# Altium PCB LNA_v5.PcbDoc
Units mil, origin at the board's own origin, x right, y up, seen from the top; angles counter-clockwise.
Board outline 6000 x 4000 mil, 2 copper layers (Top Layer, Bottom Layer); 8 components, 0 nets, 7 pads, 0 vias.
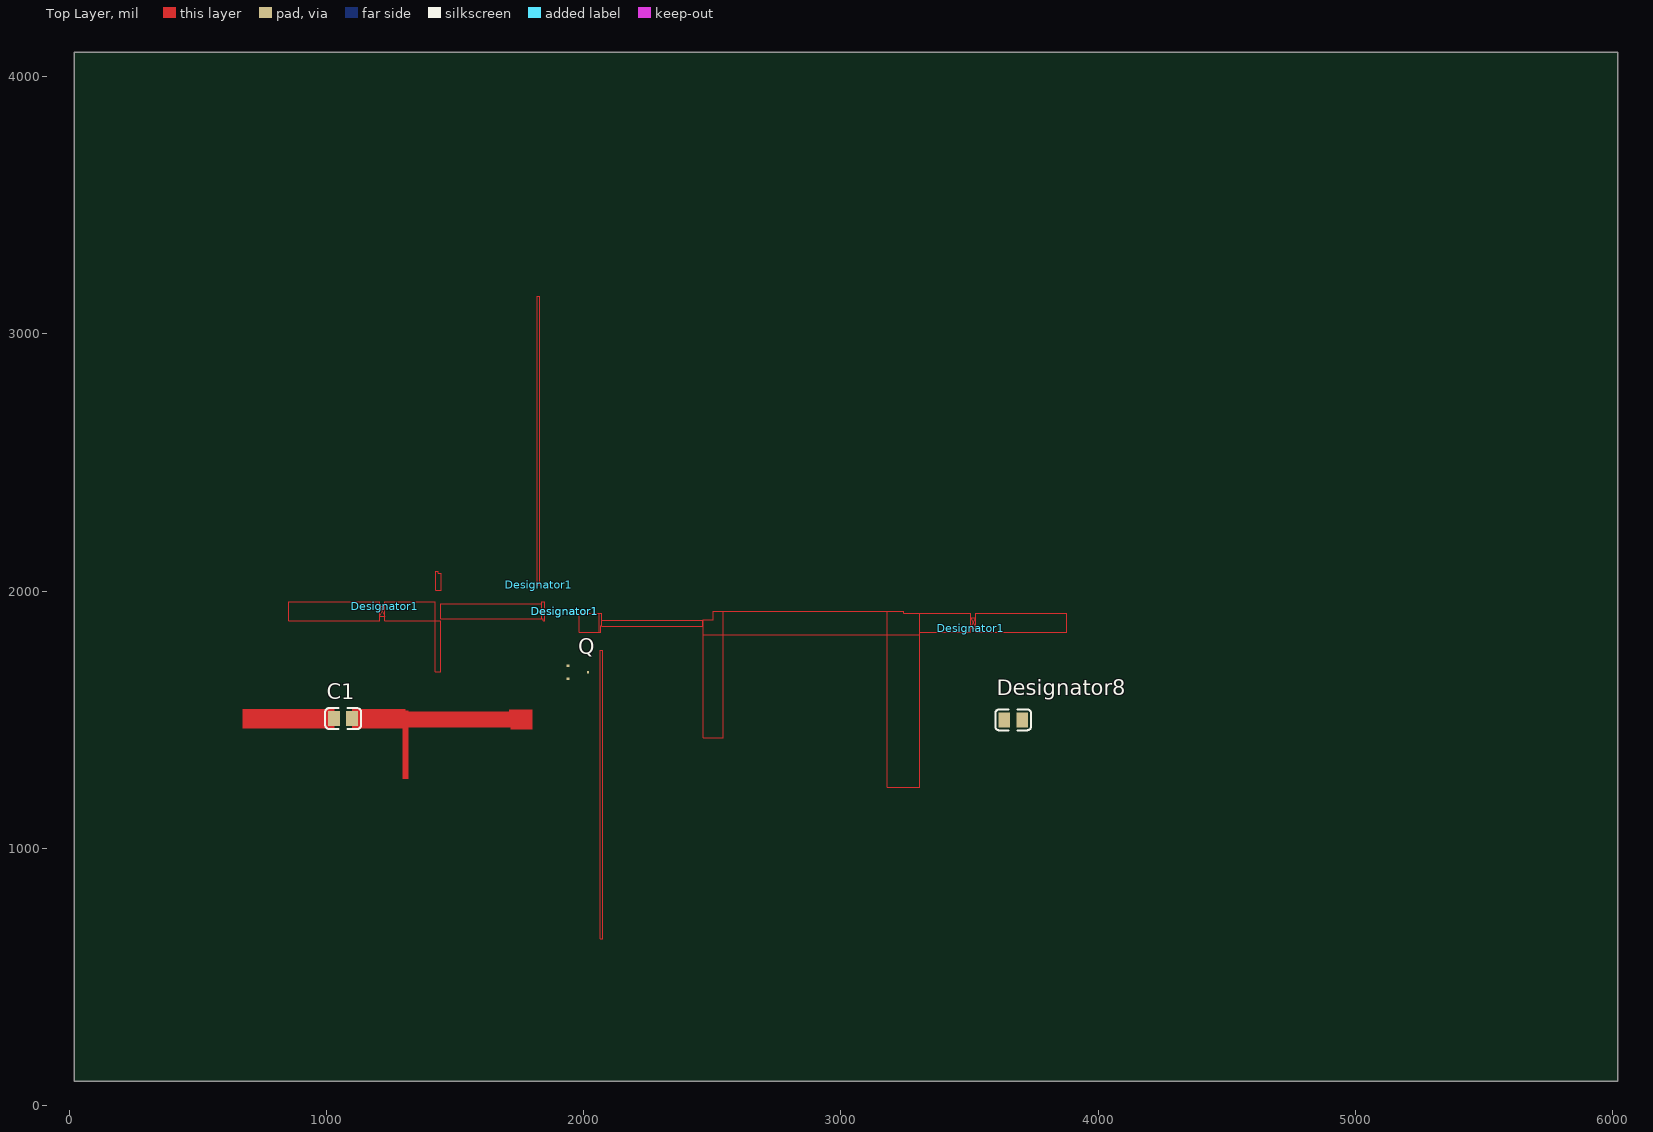
[diagram p0: Top Layer view]
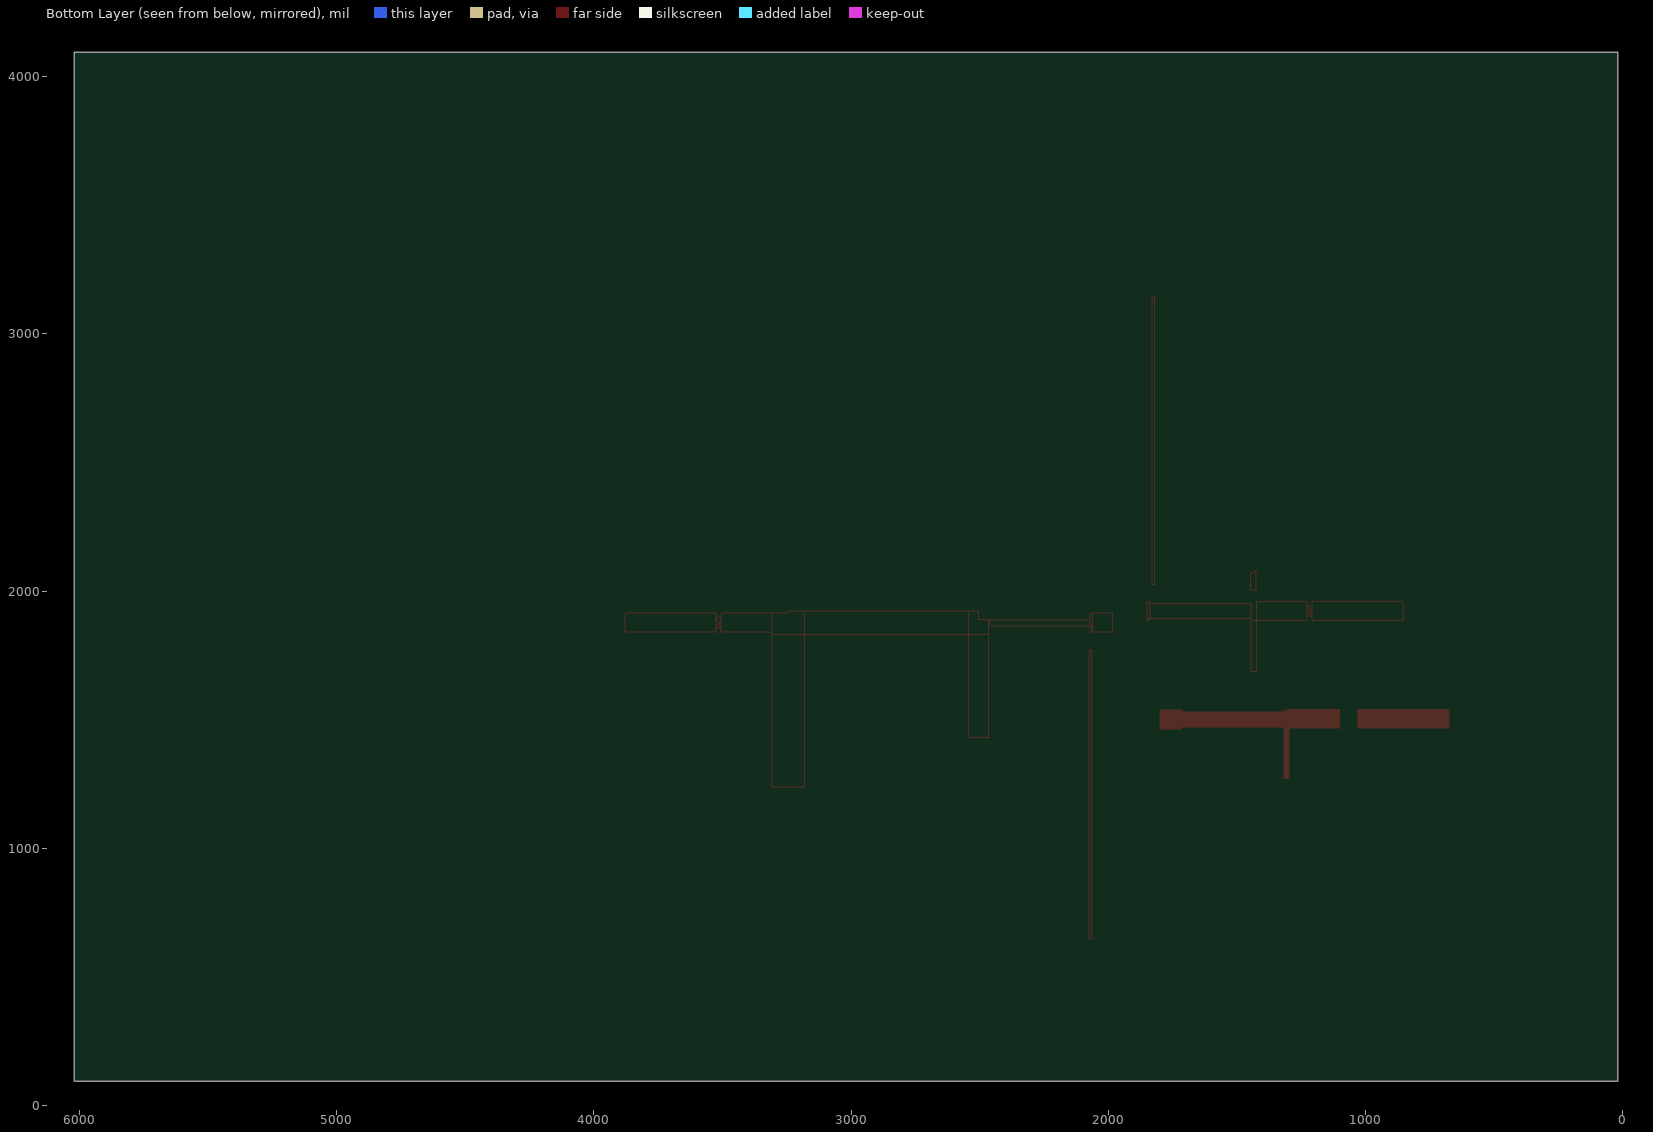
[diagram p1: Bottom Layer view, seen from below]

## Layer stack, top to bottom
Top Solder: solder mask 0.4, Solder Resist, Dk 3.5
Top Layer: signal copper 1.4
Dielectric 1: dielectric 12.6, FR-4, Dk 4.8
Bottom Layer: signal copper 1.4
Bottom Solder: solder mask 0.4, Solder Resist, Dk 3.5

## Board outline
20,95 6020,95 6020,4095 20,4095

## Design rules (kind name [scope] priority, off if disabled: settings)
Clearance [All] p1: gap=10 ignorepadtopadclearanceinfootprint=FALSE except(0: Arc-Hole Track-Hole SMDPad-Hole THPad-Hole Via-Hole Fill-Hole Poly-Hole Region-Hole Text-Hole)
PolygonConnect [All] p1: connectstyle=Relief reliefconductorwidth=10 reliefentries=4 polygonreliefangle="90 Angle" airgapwidth=10
RoutingVias [All] p1: holewidth=28 width=50 viastyle="Through Hole" minholewidth=28 minwidth=50 maxholewidth=28 maxwidth=50
SolderMaskExpansion [All] p1: expansion=4
Width [All] p1: maxlimit=10 minlimit=10 preferedwidth=10
30 further rules are at their usual default settings.

## Components (designator, comment, footprint, x,y, rotation, side; value= is the part's Value field where it differs from the comment)
C1 "Comment" 0805_C 1065,1505 r0 top
Designator1 "Comment" LNA_v4_feedback_test_ads_rflib__C__layout_C1_ 1227.29,1942.15 r180 top
Designator1 "Comment" LNA_v4_feedback_test_ads_tlines__MLIN__layout_TL4_ 1926.84,1921.65 r180 top
Designator1 "Comment" LNA_v4_feedback_test_ads_rflib__C__layout_C2_ 3504.47,1856.9 r0 top
Designator1 "Comment" LNA_v4_feedback_test_ads_tlines__MLIN__layout_TL14_ 1825,2025 r90 top
Designator1 "Comment" RF_Transistors__pb_hp_AT32032_19980529__layout 1927.09,1921.9 r270 top
Designator8 "Comment" 0805_C 3670,1500 r0 top
Q "Comment" PCBComponent_1 1940,1685 r0 top

## Footprints (in the part's own frame and the unit in brackets; to place one, negate y for a bottom-side part, rotate by r counter-clockwise, add the part's x,y. Pads: shape width x height; smd on the part's side, far side on the other; paste and mask are expansions set on the pad)
0805_C [mm]
  rect 1.16x1.47 smd: 1(-0.89,0) 2(0.89,0)
  silkscreen extent -1.77,-1.04 1.77,1.04, body extent -1,-0.62 1,0.63, height 0.77
LNA_v4_feedback_test_ads_rflib__C__layout_C1_ [mil]
  Top Layer lines w0.5: 20,40 0,0 ; 20,40 0,40 ; 20,40 20,0 ; 20,0 0,40 ; 20,0 0,0 ; 0,40 0,0
LNA_v4_feedback_test_ads_rflib__C__layout_C2_ [mil]
  Top Layer lines w0.5: 0,0 20,40 ; 0,0 0,40 ; 0,0 20,0 ; 0,40 20,0 ; 0,40 20,40 ; 20,0 20,40
LNA_v4_feedback_test_ads_tlines__MLIN__layout_TL4_ [mil]
LNA_v4_feedback_test_ads_tlines__MLIN__layout_TL14_ [mil]
  Top Layer lines w0.5: 0,5 1122.05,5 1122.05,-5 0,-5 0,5
PCBComponent_1 [mm]
  rect 0.3x0.25 smd: B(0,0.65) E(0,-0.65)
  rect 0.2x0.25 smd: C(1.95,0)
RF_Transistors__pb_hp_AT32032_19980529__layout [mil]

## Nets (pads, with @x,y where several pads share a name; then routed paths per layer and width w, separated by ;. In a path a pad name is that pad's centre, name@x,y a point inside that pad or via, vN(x,y) a via of type N, cw(c..) or ccw(c..) an arc to the next point about the centre after c; other vN are vias at no path point)
pads on no net: C1.1 C1.2 Designator8.1 Designator8.2 Q.B Q.C Q.E
copper on no net: | length 12776.5
  Top Layer w0.5: 1424.14,1885.09 1444.72,1885.09 1444.72,1687.11 1424.14,1687.11 1424.14,1885.09 ; 1424.14,1885.09 1424.14,1959.21 1227.29,1959.21 1227.29,1885.09 1424.14,1885.09 ; 1838.09,1892.62 1838.09,1959.21 1848.09,1959.21 ; 1838.09,1892.62 1843.09,1892.62 1843.09,1885.09 1848.09,1885.09 ; 1838.09,1892.62 1444.72,1892.62 1444.72,1951.68 1838.09,1951.68 1838.09,1892.62 ; 1848.09,1885.09 1848.09,1959.21 ; 1848.09,1885.09 1848.09,1959.21 ; 2061.08,1839.84 2061.08,1913.96 ; 2061.08,1839.84 2066.08,1839.84 2066.08,1865.33 2071.08,1865.33 2071.08,1913.96 2061.08,1913.96 ; 2061.08,1839.84 2061.08,1913.96 ; 2061.08,1839.84 1982.34,1839.84 1982.34,1913.96 2061.08,1913.96 ; 2464.78,1831.23 2464.78,1888.47 2504.11,1888.47 2504.11,1922.57 2543.44,1922.57 ; 2464.78,1831.23 2543.44,1831.23 ; 2464.78,1831.23 2464.78,1430.51 2543.44,1430.51 2543.44,1831.23 ; 2464.78,1831.23 2543.44,1831.23 ; 2543.44,1831.23 2543.44,1922.57 ; 2543.44,1831.23 3179.66,1831.23 ; 2543.44,1831.23 2543.44,1922.57 ; 2543.44,1922.57 3179.66,1922.57 ; 3179.66,1831.23 3179.66,1238.71 3307.62,1238.71 3307.62,1831.23 ; 3179.66,1831.23 3307.62,1831.23 ; 3179.66,1831.23 3307.62,1831.23 ; 3179.66,1831.23 3179.66,1922.57 ; 3179.66,1831.23 3179.66,1922.57 ; 3179.66,1922.57 3243.64,1922.57 3243.64,1913.96 3307.62,1913.96 ; 3307.62,1831.23 3307.62,1913.96 ; 3307.62,1913.96 3504.47,1913.96 3504.47,1839.84 3307.62,1839.84 3307.62,1913.96 ; 852.96,1885.09 1207.29,1885.09 1207.29,1959.21 852.96,1959.21 852.96,1885.09 ; 1425,2002.94 1425,2077.06 1435.29,2077.06 1435.29,2069.53 1445.58,2069.53 1445.58,2002.94 1425,2002.94 ; 2065,647.95 2075,647.95 2075,1770 2065,1770 2065,647.95 ; 2070,1863.43 2070,1886.57 2463.7,1886.57 2463.7,1863.43 2070,1863.43 ; 3524.47,1839.84 3878.8,1839.84 3878.8,1913.96 3524.47,1913.96 3524.47,1839.84

## Other copper
Top Layer:
  region: 1710.77,1471.89 ccw(c1711.03,1471.89) 1711.03,1471.63 1715.77,1471.63 1715.77,1464.37 ccw(c1716.03,1464.37) 1716.03,1464.1 1721.03,1464.1 ccw(c1721.03,1464.37) 1721.3,1464.37 1721.3,1538.48 ccw(c1721.03,1538.48) 1721.03,1538.74 1711.03,1538.74 ccw(c1711.03,1538.48) 1710.77,1538.48
  region: 1716.56,1463.97 1716.39,1471.33 cw(c1716.61,1471.55) 1716.83,1471.76 1716.83,1464.5 1721.3,1464.5 1721.3,1538.35 1800.3,1538.61 1800.57,1464.23
  region: 675.63,1467.94 1029.96,1467.94 1029.96,1542.06 675.63,1542.06
  region: 1296.89,1269.96 1317.47,1269.96 1317.47,1467.94 1296.89,1467.94
  region: 1296.89,1467.94 1296.89,1542.06 1307.18,1542.06 1307.18,1534.53 1317.47,1534.53 1317.47,1467.94
  region: 1100.04,1467.94 1296.89,1467.94 1296.89,1542.06 1100.04,1542.06
  region: 1317.47,1471.71 1710.85,1471.71 1710.85,1530.76 1317.47,1530.76